# EAGLE board مسار الكهرباء المهمة الأولى - ماتركس LED (EAGLE 9.7.0)

Size 115.16 x 82.4 mm. Coordinates in mm from the lower left corner, seen from the top.
Outline: 0,0 115.16,0 115.16,82.4 0,82.4 0,0
Copper layers (1*16): Top 0.035mm / dielectric 1.5mm / Bottom 0.035mm
Design rules "default": minimum track width 6mil, minimum drill 0.35mm, track to track 6mil, track to pad 6mil, pad to pad 6mil, via to via 6mil, smd to smd 6mil, copper to edge 40mil, drill to drill 6mil, minimum pad ring 10mil, minimum via ring 8mil, stop-mask expansion 4mil, vias tented up to drill 0mil, thermal gap 10mil

## Footprints (pad centres in the part's own frame; a part is rotated, then mirrored left to right if it is on the bottom)
LEDRD254W60D565H860B = drill 0.981 pad 1.581: 1 -1.27,0; 2 1.27,0
RESAD1016W63L850D250B = drill 0.83 pad 1.43: 1 -5.08,0; 2 5.08,0
ARDUINO-UNO-R3-SHIELD = drill 1.016 pad 1.88: 3.3V 24.13,-2.54; 5V 24.13,0; A0 24.13,12.7; A1 24.13,15.24; A2 24.13,17.78; A3 24.13,20.32; A4 24.13,22.86; A5 24.13,25.4; AREF -24.13,-13.97; D2 -24.13,20.32; D3 -24.13,17.78; D4 -24.13,15.24; D5 -24.13,12.7; D6 -24.13,10.16; D7 -24.13,7.62; D8 -24.13,3.81; D9 -24.13,1.27; D10 -24.13,-1.27; D11 -24.13,-3.81; D12 -24.13,-6.35; D13 -24.13,-8.89; GND@0 24.13,2.54; GND@1 24.13,5.08; GND@2 -24.13,-11.43; IOREF 24.13,-7.62; NC 24.13,-10.16; RES 24.13,-5.08; RX -24.13,25.4; SCL -24.13,-19.05; SDA -24.13,-16.51; TX -24.13,22.86; VIN 24.13,7.62

## Placement (x,y rotation side)
D1  RED  [LEDRD254W60D565H860B]  79.64,54.81 180 top
D2  RED  [LEDRD254W60D565H860B]  87.43,54.81 180 top
D3  RED  [LEDRD254W60D565H860B]  95.02,54.59 180 top
D4  RED  [LEDRD254W60D565H860B]  80.06,45.84 180 top
D5  RED  [LEDRD254W60D565H860B]  109.1,54.84 180 top
D6  RED  [LEDRD254W60D565H860B]  87.64,46.06 180 top
D7  RED  [LEDRD254W60D565H860B]  94.79,45.95 180 top
D8  RED  [LEDRD254W60D565H860B]  94.9,37.2 180 top
D9  RED  [LEDRD254W60D565H860B]  87.64,37.3 180 top
D10  RED  [LEDRD254W60D565H860B]  79.96,37.41 180 top
D11  RED  [LEDRD254W60D565H860B]  102.05,54.84 180 top
D12  RED  [LEDRD254W60D565H860B]  101.94,45.74 180 top
D13  RED  [LEDRD254W60D565H860B]  102.05,37.09 180 top
D18  RED  [LEDRD254W60D565H860B]  109.1,45.7 180 top
D19  RED  [LEDRD254W60D565H860B]  109.1,37.25 180 top
D21  RED  [LEDRD254W60D565H860B]  79.2,63.46 180 top
D22  RED  [LEDRD254W60D565H860B]  87.09,63.26 180 top
D23  RED  [LEDRD254W60D565H860B]  94.96,63.38 180 top
D24  RED  [LEDRD254W60D565H860B]  101.89,63.64 180 top
D25  RED  [LEDRD254W60D565H860B]  108.4,63.81 180 top
D26  RED  [LEDRD254W60D565H860B]  78.99,72.97 180 top
D27  RED  [LEDRD254W60D565H860B]  86.64,72.89 180 top
D28  RED  [LEDRD254W60D565H860B]  94.37,72.7 180 top
D29  RED  [LEDRD254W60D565H860B]  101.78,73.11 180 top
D30  RED  [LEDRD254W60D565H860B]  108.31,73.44 180 top
R2  1  [RESAD1016W63L850D250B]  78.69,28.58 90 top
R3  1  [RESAD1016W63L850D250B]  86.54,28.33 90 top
R4  [RESAD1016W63L850D250B]  93.87,28.92 90 top
R5  1  [RESAD1016W63L850D250B]  100.95,28.85 90 top
R6  1  [RESAD1016W63L850D250B]  107.57,28.57 90 top
U1  ARDUINO-UNO-R3-SHIELD  [ARDUINO-UNO-R3-SHIELD]  29.84,34.52 180 top

## Library data of the parts
D1-D13 D18 D19 D21-D30 = Tinkercad; CATEGORY: Opto-Electronic; SUB-CATEGORY: LED; VALUE: LED_RED
R2-R6 U1 = Tinkercad

## Nets
D2_C: D2.2 D6.2 D9.2 D22.2 D27.2 R3.2
D4_C: D1.2 D4.2 D10.2 D21.2 D26.2 R2.2
D8_C: D3.2 D7.2 D8.2 D23.2 D28.2 R4.2
D11_C: D11.2 D12.2 D13.2 D24.2 D29.2 R5.2
D25_C: D5.2 D18.2 D19.2 D25.2 D30.2 R6.2
U1_A0: R6.1 U1.A0
U1_A1: R5.1 U1.A1
U1_A2: R4.1 U1.A2
U1_A3: R3.1 U1.A3
U1_A4: R2.1 U1.A4
U1_D3: D8.1 D9.1 D10.1 D13.1 D19.1 U1.D3
U1_D4: D4.1 D6.1 D7.1 D12.1 D18.1 U1.D4
U1_D5: D1.1 D2.1 D3.1 D5.1 D11.1 U1.D5
U1_D6: D21.1 D22.1 D23.1 D24.1 D25.1 U1.D6
U1_D7: D26.1 D27.1 D28.1 D29.1 D30.1 U1.D7

## Tracks (layer width: path | path; a pad name or v marks a point on that pad's centre or on a via)
D2_C  (5 unrouted)
D4_C  (5 unrouted)
D8_C  (5 unrouted)
D11_C  (5 unrouted)
D25_C  (5 unrouted)
U1_A0  (1 unrouted)
U1_A1  (1 unrouted)
U1_A2  (1 unrouted)
U1_A3  (1 unrouted)
U1_A4  (1 unrouted)
U1_D3  (5 unrouted)
U1_D4  (5 unrouted)
U1_D5  (5 unrouted)
U1_D6  (5 unrouted)
U1_D7  (5 unrouted)